# Altium PCB flipperzero-devboard-stlinkv3.PcbDoc
Units mm, origin at the board's own origin, x right, y up, seen from the top; angles counter-clockwise.
Board outline 78.8 x 32.41 mm, 2 copper layers (Top Layer, Bottom Layer); 40 components, 46 nets, 232 pads, 54 vias.
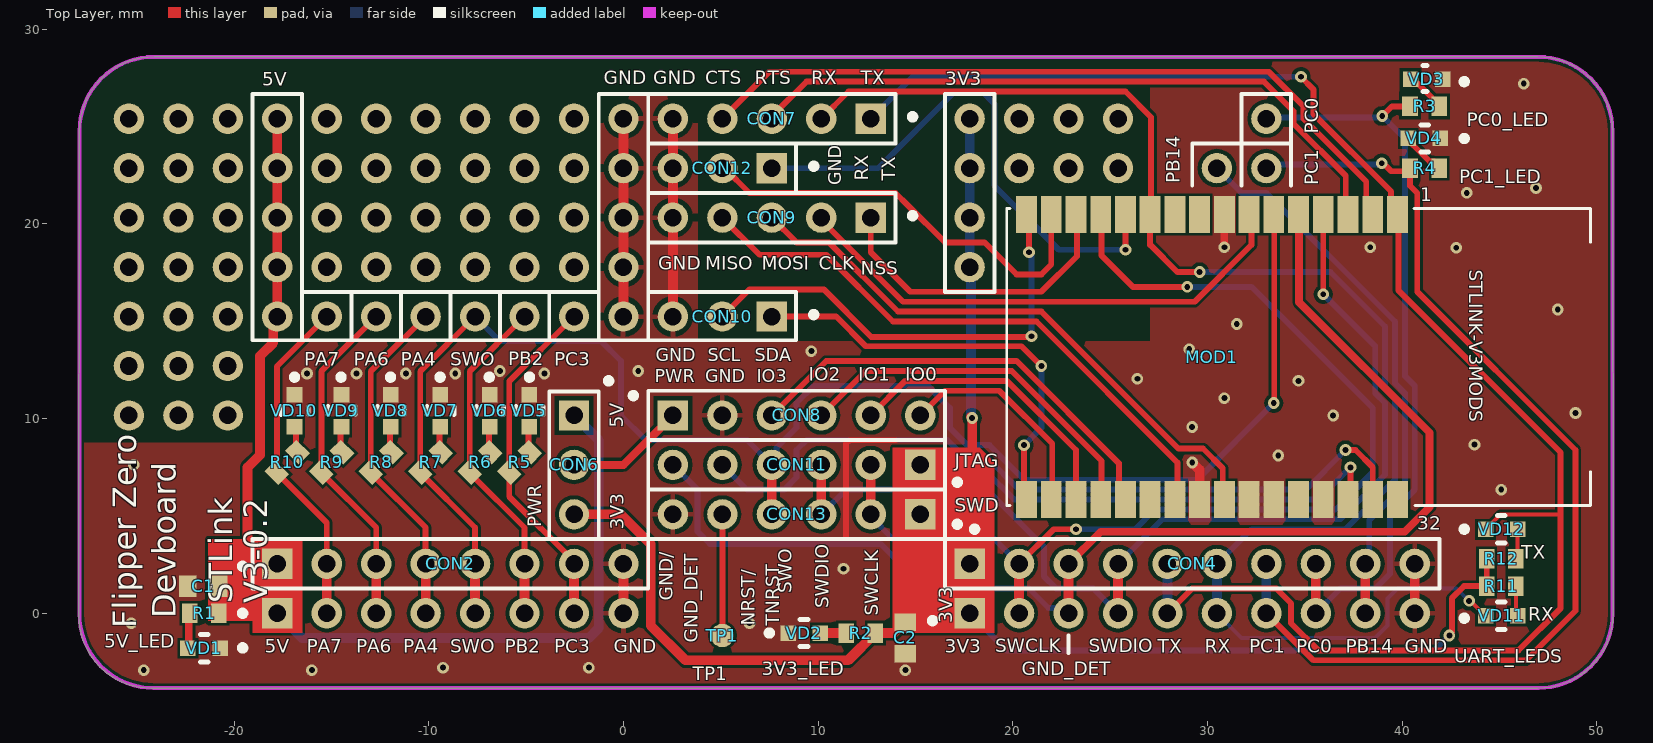
[diagram p0: Top Layer view]
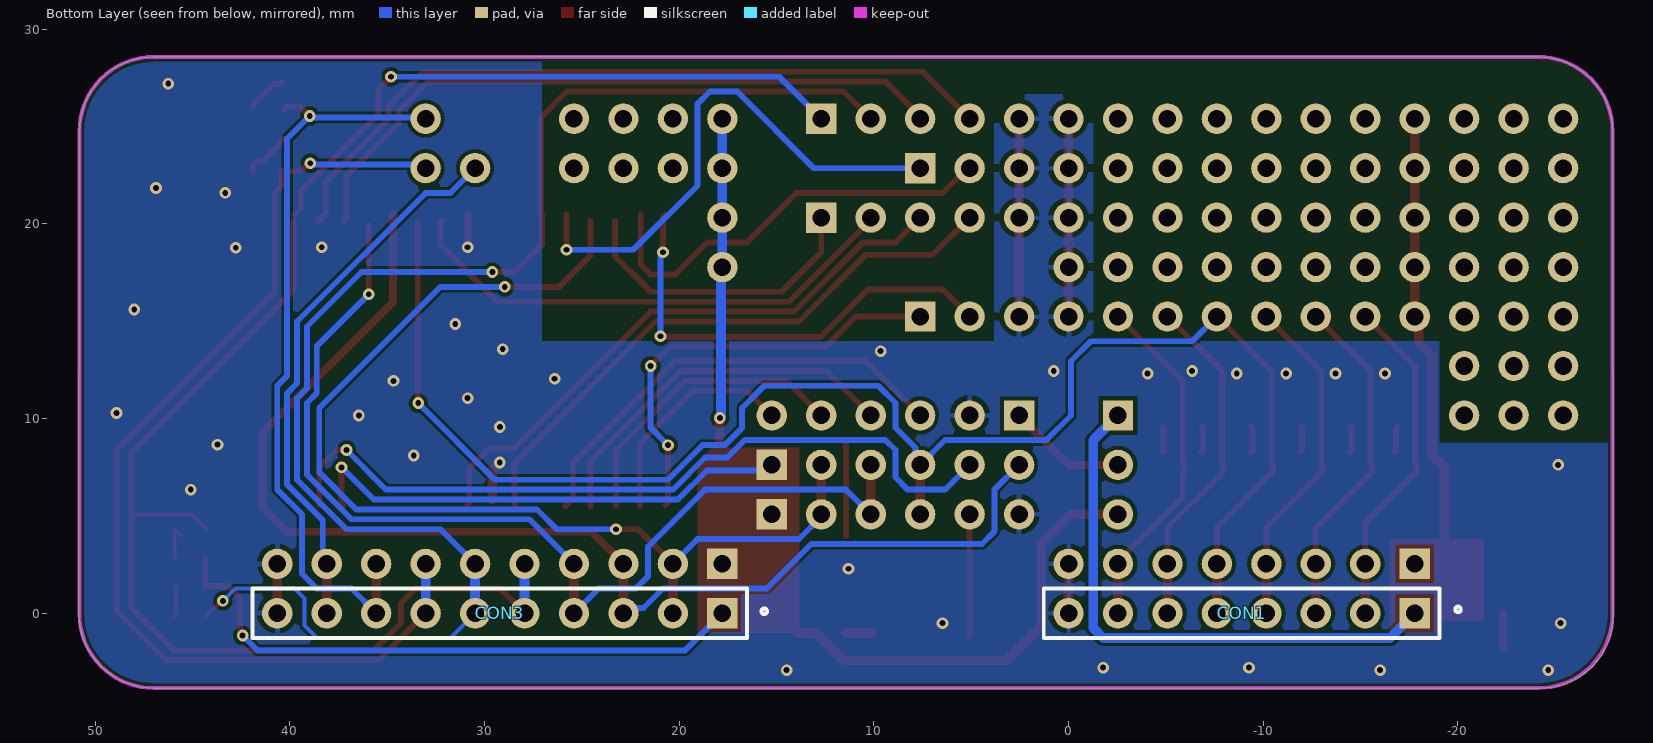
[diagram p1: Bottom Layer view, seen from below]
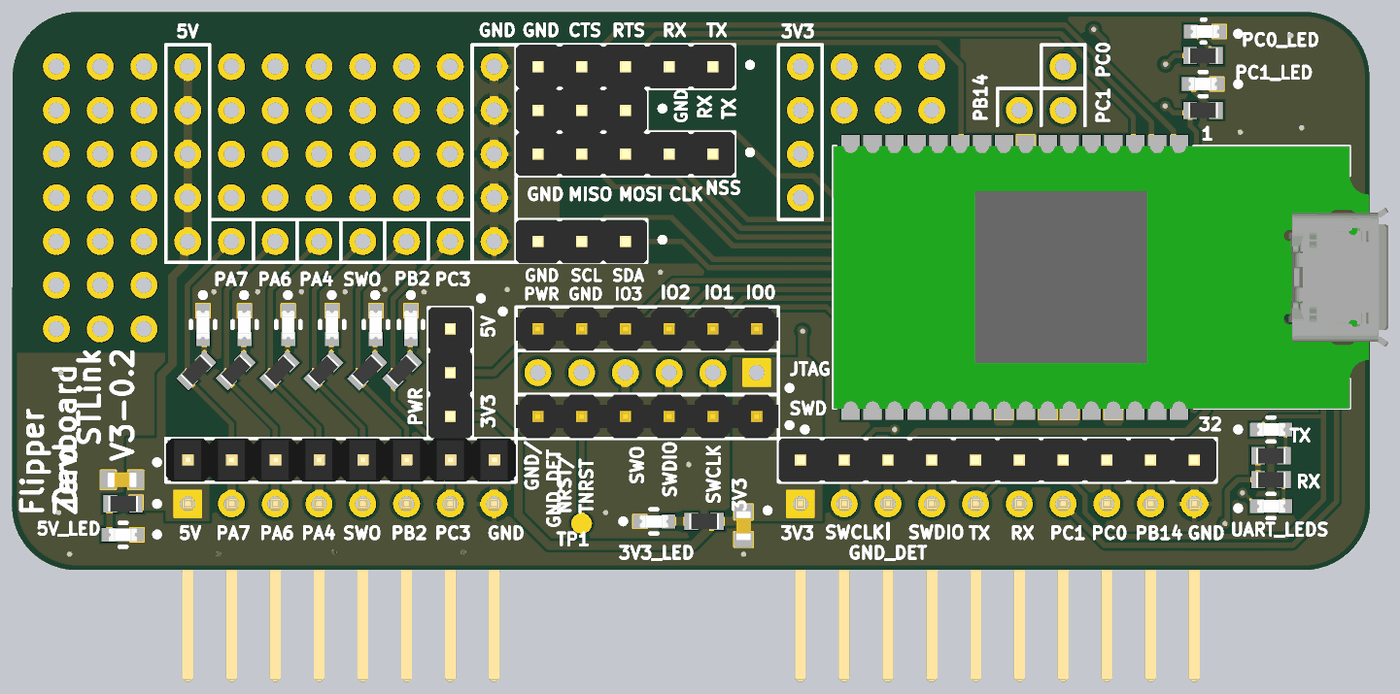
[diagram p2: 3D render of the assembled board from above, using the file's embedded part models]

## Layer stack, top to bottom
Top Solder: solder mask 0.0102, Solder Resist, Dk 3.5
Top Layer: signal copper 0.0356
Dielectric 1: dielectric 0.32, FR-4, Dk 4.8
Bottom Layer: signal copper 0.0356
Bottom Solder: solder mask 0.0102, Solder Resist, Dk 3.5

## Board outline
-24.257,-3.84 cw(c-24.257,-0.128) -27.969,-0.128 -27.94,24.765 cw(c-24.13,24.765) -24.13,28.575 46.99,28.575 cw(c46.99,24.765) 50.8,24.765 50.827,-0.003 cw(c46.99,-0.003) 46.99,-3.84

## Design rules (kind name [scope] priority, off if disabled: settings)
BoardOutlineClearance [All] p1: gap=0.2 ignorepadtopadclearanceinfootprint=FALSE
Clearance [All] p1: gap=0.2 ignorepadtopadclearanceinfootprint=FALSE except(0.1: Arc-Arc Arc-Track Track-Track; 0.15: Arc-SMDPad Arc-Fill Arc-Poly Arc-Region Track-SMDPad Track-Fill Track-Poly Track-Region SMDPad-SMDPad SMDPad-Fill SMDPad-Poly SMDPad-Region Fill-Fill Fill-Poly Fill-Region Poly-Poly Poly-Region Region-Region; 0.3: THPad-Via Via-Via)
ComponentClearance [All] p1: gap=0 collisioncheckmode=3 verticalgap=0 showdistances=FALSE
HoleSize [All] p1: absolutevalues=TRUE maxlimit=5 minlimit=0.1 maxpercent=80.000 minpercent=20.000
HoleToHoleClearance [All] p1: gap=0.35 allowstackedmicrovias=TRUE
MinimumAnnularRing [All] p1: minimumring=0.1
MinimumSolderMaskSliver MinimumSolderMaskSliver_STLINK [InComponent('MOD1')] p1: minsoldermaskwidth=0.09
MinimumSolderMaskSliver [All] p2: minsoldermaskwidth=0.1
PolygonConnect [All] p1: thpad.connectstyle=Relief thpad.reliefconductorwidth=0.254 thpad.reliefentries=4 thpad.polygonreliefangle="90 Angle" thpad.airgapwidth=0.254 smdpad.connectstyle=Direct smdpad.reliefconductorwidth=0.254 smdpad.reliefentries=4 smdpad.polygonreliefangle="90 Angle" smdpad.airgapwidth=0.254 via.connectstyle=Direct via.reliefconductorwidth=0.254 via.reliefentries=4 via.polygonreliefangle="90 Angle" via.airgapwidth=0.254
RoutingVias [All] p1: holewidth=0.2 width=0.4 viastyle="Through Hole" minholewidth=0.1 minwidth=0.3 maxholewidth=2 maxwidth=4
SilkToSilkClearance [All] p1: silktosilkclearance=0.2
SilkToSolderMaskClearance [IsPad OR IsVia] p1: minsilkscreentomaskgap=0.2 clearancetoexposedcopper=TRUE
SolderMaskExpansion [All] p1: expansion=0.05 istentingtop=FALSE
Width [All] p1: maxlimit=1 minlimit=0.1 preferedwidth=0.2
24 further rules are at their usual default settings.

## Components (designator, comment, footprint, x,y, rotation, side; value= is the part's Value field where it differs from the comment)
C1 "1uF" CAP0603 -21.59,1.397 r0 top value=1µF
C2 "1uF" CAP0603 14.478,-1.27 r90 top value=1µF
CON1 "DS1022-1*8R" PLS-8R -17.78,0 r0 bottom locked
CON2 "DS-1021-1x8" PLS-8 -17.78,2.54 r0 top
CON3 "DS1022-1*10R" PLS-10R 17.78,0 r0 bottom
CON4 "DS-1021-1x10" PLS-10 17.78,2.54 r0 top locked
CON6 "DS-1021-1x3" PLS-3 -2.54,10.16 r270 top
CON7 "DS-1021-1x5" PLS-5 12.7,25.4 r180 top
CON8 "DS-1021-1x6" PLS-6 2.54,10.16 r0 top
CON9 "DS-1021-1x5" PLS-5 12.7,20.32 r180 top
CON10 "DS-1021-1x3" PLS-3 7.62,15.24 r180 top
CON11 "DS-1021-1x6" PLS-6 15.24,7.62 r180 top
CON12 "DS-1021-1x3" PLS-3 7.62,22.86 r180 top
CON13 "DS-1021-1x6" PLS-6 15.24,5.08 r180 top locked
MOD1 "STLINK-V3MOD" STLINK-V3MOD 49.657,13.162 r270 top
R1 "1K" RESC1608X55X25ML10T15 -21.526,0 r180 top value=1k
R2 "1K" RESC1608X55X25ML10T15 12.192,-1.016 r180 top value=1k
R3 "1K" RESC1608X55X25ML10T15 41.148,26.035 r0 top value=1k
R4 "1K" RESC1608X55X25ML10T15 41.148,22.86 r0 top value=1k
R5 "1K" RESC1608X55X25ML10T15 -5.334,7.747 r45 top value=1k
R6 "1K" RESC1608X55X25ML10T15 -7.366,7.747 r45 top value=1k
R7 "1K" RESC1608X55X25ML10T15 -9.906,7.747 r45 top value=1k
R8 "1K" RESC1608X55X25ML10T15 -12.446,7.747 r45 top value=1k
R9 "1K" RESC1608X55X25ML10T15 -14.986,7.747 r45 top value=1k
R10 "1K" RESC1608X55X25ML10T15 -17.272,7.747 r45 top value=1k
R11 "1K" RESC1608X55X25ML10T15 45.085,1.397 r180 top value=1k
R12 "1K" RESC1608X55X25ML10T15 45.085,2.794 r180 top value=1k
TP1 "Control_point" "control point_1mm" 5.08,-1.143 r90 top
VD1 "BLUE LED" "LED 0603" -21.526,-1.8 r270 top
VD2 "BLUE LED" "LED 0603" 9.271,-1.016 r90 top
VD3 "GREEN LED" "LED 0603" 41.275,27.432 r270 top
VD4 "GREEN LED" "LED 0603" 41.148,24.384 r270 top
VD5 "GREEN LED" "LED 0603" -4.826,10.414 r0 top
VD6 "GREEN LED" "LED 0603" -6.858,10.414 r0 top
VD7 "GREEN LED" "LED 0603" -9.398,10.414 r0 top
VD8 "GREEN LED" "LED 0603" -11.938,10.414 r0 top
VD9 "GREEN LED" "LED 0603" -14.478,10.414 r0 top
VD10 "GREEN LED" "LED 0603" -16.891,10.414 r0 top
VD11 "RED LED" "LED 0603" 45.085,-0.127 r90 top
VD12 "RED LED" "LED 0603" 45.085,4.318 r90 top

## Footprints (in the part's own frame and the unit in brackets; to place one, negate y for a bottom-side part, rotate by r counter-clockwise, add the part's x,y. Pads: shape width x height; smd on the part's side, far side on the other; paste and mask are expansions set on the pad)
CAP0603 [mm]
  rect 0.9x1.1 smd: 1(-0.8,0) 2(0.8,0)
  body extent -0.85,-0.43 0.85,0.43, height 0.9
"control point_1mm" [mm]
  round 1.2 smd paste-2 mask+0.05: 1(0,0)
"LED 0603" [mm]
  rect 0.8x0.8 smd: 1(-0.005,0.808) 2(-0.005,-0.842)
  silkscreen extent -0.7,-0.2 0.7,0.2, body extent -0.37,-0.84 0.36,0.81, height 0.68
PLS-3 [mm]
  rect 1.56x1.56 hole 0.9: 1(0,0)
  round 1.56 hole 0.9: 2(2.54,0) 3(5.08,0)
  silkscreen extent -1.92,1.64 -1.64,1.92, body extent -1.27,-1.27 6.35,1.27, height 8.54
PLS-5 [mm]
  rect 1.56x1.56 hole 0.9: 1(0,0)
  round 1.56 hole 0.9: 2(2.54,0) 3(5.08,0) 4(7.62,0) 5(10.16,0)
  silkscreen extent -2.29,-0.24 -2.01,0.04, body extent -1.27,-1.27 11.43,1.27, height 8.54
PLS-6 [mm]
  rect 1.56x1.56 hole 0.9: 1(0,0)
  round 1.56 hole 0.9: 2(2.54,0) 3(5.08,0) 4(7.62,0) 5(10.16,0) 6(12.7,0)
  body extent -1.27,-1.27 13.97,1.27, height 8.54
PLS-8 [mm]
  rect 1.56x1.56 hole 0.9: 1(0,0)
  round 1.56 hole 0.9: 2(2.54,0) 3(5.08,0) 4(7.62,0) 5(10.16,0) 6(12.7,0) 7(15.24,0) 8(17.78,0)
  silkscreen extent -1.92,-0.27 -1.64,0.01, body extent -1.27,-1.27 19.05,1.27, height 9.2
PLS-8R [mm]
  rect 1.56x1.56 hole 0.9: 1(0,0)
  round 1.56 hole 0.9: 2(2.54,0) 3(5.08,0) 4(7.62,0) 5(10.16,0) 6(12.7,0) 7(15.24,0) 8(17.78,0)
  silkscreen extent -2.37,-0.34 -2.08,-0.06, body extent -1.27,-0.32 19.05,10.34, height 2.54
PLS-10 [mm]
  rect 1.56x1.56 hole 0.9: 1(0,0)
  round 1.56 hole 0.9: 2(2.54,0) 3(5.08,0) 4(7.62,0) 5(10.16,0) 6(12.7,0) 7(15.24,0) 8(17.78,0) 9(20.32,0) 10(22.86,0)
  silkscreen extent 0.11,1.64 0.4,1.92, body extent -1.27,-1.27 24.13,1.27, height 8.54
PLS-10R [mm]
  rect 1.56x1.56 hole 0.9: 1(0,0)
  round 1.56 hole 0.9: 2(2.54,0) 3(5.08,0) 4(7.62,0) 5(10.16,0) 6(12.7,0) 7(15.24,0) 8(17.78,0) 9(20.32,0) 10(22.86,0)
  silkscreen extent -2.29,-0.24 -2.01,0.04, body extent -1.27,-0.32 24.13,10.34, height 2.54
RESC1608X55X25ML10T15 [mm] "Chip Resistor, 2-Leads, Body 1.70x0.90mm, IPC Low Density"
  rect 0.8x1 smd: 1(-0.75,0) 2(0.75,0)
  body extent -0.85,-0.45 0.85,0.45, height 0.55
STLINK-V3MOD [mil]
  rect 74.8x42.13 smd: 1(-288.19,-390) 2(-288.19,-440) 3(-288.19,-490) 4(-288.19,-540) 5(-288.19,-590) 6(-288.19,-640) 7(-288.19,-690) 8(-288.19,-740) 9(-288.19,-790) 10(-288.19,-840) 11(-288.19,-890) 12(-288.19,-940) 13(-288.19,-990) 14(-288.19,-1040) 15(-288.19,-1090) 16(-288.19,-1140) 17(288.19,-1140) 18(288.19,-1090) 19(288.19,-1040) 20(288.19,-990) 21(288.19,-940) 22(288.19,-890) 23(288.19,-840) 24(288.19,-790) 25(288.19,-740) 26(288.19,-690) 27(288.19,-640) 28(288.19,-590) 29(288.19,-540) 30(288.19,-490) 31(288.19,-440) 32(288.19,-390)
  silkscreen extent -300,-1180 300,0, body extent -300,-1180 300,89, height 126

## Part data
C1 C2: library part CMP-001-00097-2, "Chip Capacitor", Case=0603, Dielectric=X5R, TOLERANCE=10%, Voltage=16V, Case/Package=0603, Company="Flipper Devices", Component Type=Standard, Design Item ID=CAP_1uF_0603, Internal_PN=FDCAP0016, Pins=2, Source=Flipper_zero.SchLib
CON1: library part CMP-003-000005-6, "Connector 2.54mm 1х8 Angular Type", Company="Flipper Zero", Component Type=Standard, Design Item ID=DS-1022-1x8, Internal_PN=FDCON0014, Pin Count=8, Source=MIDI.SchLib
CON2: library part CMP-003-000065-2, "Connector 2.54mm 1х8 Straight Type", Company="Flipper Zero", Component Type=Standard, Design Item ID=DS-1021-1x8, Internal_PN=FDCON0016, Pin Count=8, Source=MIDI.SchLib
CON3: library part CMP-003-000004-6, "Connector 2.54mm 1х10 Angular Type", Company="Flipper Zero", Component Type=Standard, Design Item ID=DS-1022-1x10, Internal_PN=FDCON0015, Pin Count=10, Source=MIDI.SchLib
CON4: library part CMP-003-000066-2, "Connector 2.54mm 1х10 Straight Type", Company="Flipper Zero", Component Type=Standard, Design Item ID=DS-1021-1x10, Internal_PN=FDCON0017, Pin Count=10, Source=MIDI.SchLib
CON6 CON10 CON12: library part CMP-003-000069-1, "Connector 2.54mm 1х3 Straight Type", Company="Flipper Zero", Component Type=Standard, Design Item ID=DS-1021-1x3, Internal_PN=FDCON0018, Pin Count=3, Source=MIDI.SchLib
CON7 CON9: library part CMP-003-000071-1, "Connector 2.54mm 1х5 Straight Type", Company="Flipper Zero", Component Type=Standard, Design Item ID=DS-1021-1x5, Internal_PN=FDCON0020, Pin Count=4, Source=MIDI.SchLib
CON8 CON11 CON13: library part CMP-003-000072-1, "Connector 2.54mm 1х6 Straight Type", Company="Flipper Zero", Component Type=Standard, Design Item ID=DS-1021-1x6, Internal_PN=FDCON0021, Pin Count=6, Source=MIDI.SchLib
MOD1: library part CMP-00030-00002-3, "STLINK-V3 Compact In-Circuit Debugger and Programmer for STM32 Microcontroller", Company="Flipper Devices", Internal_PN=FDMOD0002, Pins=32
R1 R2 R3 R4 R5 R6 R7 R8 R9 R10 R11 R12: library part CMP-009-00014-6, "Chip Resistor, 1 KOhm, +/-5%, 0.1 W, -55 to 155 degC, 0603 (1608 Metric)", Case/Package=0603, Power=100mW, TOLERANCE=5%, Voltage Rating=50V, Company="Flipper Devices", Internal_PN=FDRES0034, Mounting Technology=SM, Pins=2, RoHS Compliant=True
TP1: library part CMP-016-000010-5, "Testpoint", ClassName=Testpoint, Company="Flipper Devices", Component Type="Standard (No BOM)", Design Item ID="control point", Pin Count=1, Source=Flipper_zero.SchLib
VD1 VD2 VD3 VD4 VD5 VD6 VD7 VD8 VD9 VD10 VD11 VD12: library part CMP-003-000068-1, "LED", Case=SMD/SMT, Case/Package=0603, Company="Flipper Devices", Component Type=Standard, Pin Count=2, Source=Flipper_zero.SchLib
  VD1 VD2: Internal_PN=FDDIO0008
  VD3 VD4 VD5 VD6 VD7 VD8 VD9 VD10: Internal_PN=FDDIO0009
  VD11 VD12: Internal_PN=FDDIO0010

## Free pads (board coordinates)
  round 1.56 hole 0.9: 2(-17.78,15.24) 2(-12.7,15.24) 2(-10.16,15.24) 2(-7.62,15.24) 2(-5.08,15.24) 2(-2.54,15.24) 2(0,15.24) ""(-25.4,10.16) ""(-25.4,12.7) ""(-25.4,15.24) ""(-25.4,17.78) ""(-25.4,20.32) ""(-25.4,22.86) ""(-25.4,25.4) ""(-22.86,10.16) ""(-22.86,12.7) ""(-22.86,15.24) ""(-22.86,17.78) ""(-22.86,20.32) ""(-22.86,22.86) ""(-22.86,25.4) ""(-20.32,10.16) ""(-20.32,12.7) ""(-20.32,15.24) ""(-20.32,17.78) ""(-20.32,20.32) ""(-20.32,22.86) ""(-20.32,25.4) ""(-17.78,17.78) ""(-17.78,20.32) ""(-17.78,22.86) ""(-17.78,25.4) ""(-15.24,15.24) ""(-15.24,17.78) ""(-15.24,20.32) ""(-15.24,22.86) ""(-15.24,25.4) ""(-12.7,17.78) ""(-12.7,20.32) ""(-12.7,22.86) ""(-12.7,25.4) ""(-10.16,17.78) ""(-10.16,20.32) ""(-10.16,22.86) ""(-10.16,25.4) ""(-7.62,17.78) ""(-7.62,20.32) ""(-7.62,22.86) ""(-7.62,25.4) ""(-5.08,17.78) ""(-5.08,20.32) ""(-5.08,22.86) ""(-5.08,25.4) ""(-2.54,17.78) ""(-2.54,20.32) ""(-2.54,22.86) ""(-2.54,25.4) ""(0,17.78) ""(0,20.32) ""(0,22.86) ""(0,25.4) ""(17.78,17.78) ""(17.78,20.32) ""(17.78,22.86) ""(17.78,25.4) ""(20.32,22.86) ""(20.32,25.4) ""(22.86,22.86) ""(22.86,25.4) ""(25.4,22.86) ""(25.4,25.4) ""(30.48,22.86) ""(33.02,22.86) ""(33.02,25.4)

## Via types
v1: diameter 0.6, hole 0.3, Top Layer to Bottom Layer, tented both sides, 53 vias
v2: diameter 0.6, hole 0.3, Top Layer to Bottom Layer, 1 vias

## Nets (pads, with @x,y where several pads share a name; then routed paths per layer and width w, separated by ;. In a path a pad name is that pad's centre, name@x,y a point inside that pad or via, vN(x,y) a via of type N, cw(c..) or ccw(c..) an arc to the next point about the centre after c; other vN are vias at no path point)
3V3: C2.2 CON3.1 CON4.1 CON6.3 CON11.1 CON13.1 MOD1.30 pad.@17.78,17.78 pad.@17.78,20.32 pad.@17.78,22.86 pad.@17.78,25.4 R2.1 R11.2 R12.2 | length 108.9
  Top Layer w0.3: MOD1.30@37.259,5.507 37.338,5.586 v1(37.338,7.493) ; v2@42.545,-0.989 42.545,0.764 43.178,1.397 R11.2 R12.2
  Top Layer w0.5: CON6.3 -0.127,5.08 1.397,3.556 1.397,-0.635 3.175,-2.413 11.545,-2.413 R2.1 ; R2.1@12.954,-1.004 R2.1 ; C2.2@14.378,-0.089 C2.2@14.478,-0.089 ; C2.2 14.378,-0.47 14.178,-0.67 14.178,-0.723 13.885,-1.016 R2.1 ; 14.478,0 CON3.1 CON4.1 17.907,2.667 v1(17.907,10.033) v1@17.843,10.096 ; 14.72,2.794 14.72,2.894 ; v2(42.418,-1.143) v2@42.418,-1.116
  Bottom Layer w0.3: CON11.1 15.525,7.335 18.573,7.335 20.066,5.842 35.687,5.842 v1(37.338,7.493) ; CON3.1 19.685,-1.905 41.656,-1.905 v2(42.418,-1.143)
  Bottom Layer w0.5: pad.@17.78,17.78 17.78,20.32 17.78,22.86 pad.@17.78,25.4 ; v1@17.843,10.096 pad.@17.843,17.78
5V: C1.2 CON1.1 CON2.1 CON6.1 pad.2@-17.78,15.24 pad.@-17.78,17.78 pad.@-17.78,20.32 pad.@-17.78,22.86 pad.@-17.78,25.4 R1.1 | length 55
  Top Layer w0.5: -19.05,2.413 -19.304,2.667 -19.304,7.493 -18.669,8.128 -18.669,13.208 -17.983,13.894 -17.983,15.037 -17.78,15.24 -17.78,17.78 -17.78,20.32 -17.78,22.86 pad.@-17.78,25.4 ; CON1.1 CON2.1
  Bottom Layer w0.5: CON1.1 -16.51,-1.27 -1.778,-1.27 -1.27,-0.762 -1.27,8.89 CON6.1
GND: C1.1 C2.1 CON1.8 CON2.8 CON3.10 CON4.10 CON7.5 CON8.2 CON9.5 CON10.3 CON12.3 CON13.6 MOD1.8 MOD1.24 MOD1.26 MOD1.27 MOD1.29 pad.2@0,15.24 pad.@0,17.78 pad.@0,20.32 pad.@0,22.86 pad.@0,25.4 VD1.1 VD2.1 VD3.1 VD4.1 VD5.1 VD6.1 VD7.1 VD8.1 VD9.1 VD10.1 | length 36.5
  Top Layer w0.3: 11.43,3.977 11.43,8.714 11.606,8.89 13.97,8.89
  Top Layer w0.381: v1(30.861,18.796) MOD1.8
  Top Layer w0.5: CON1.8 CON2.8 ; pad.2@0,15.24 0,17.78 0,20.32 0,22.86 pad.@0,25.4 ; CON10.3 CON9.5 CON12.3 CON7.5 ; v1(29.21,7.747) 29.591,7.366 MOD1.24 ; CON3.10 CON4.10
  other v1: -24.638,-2.921 -16.002,-2.921 14.478,-2.921 -9.271,-2.794 -1.778,-2.794 -25.273,-0.508 6.477,-0.508 11.303,2.286 45.085,6.35 -25.146,7.62 33.631,8.104 43.705,8.66 29.205,9.571 36.449,10.16 48.895,10.287 30.861,11.049 34.671,11.938 26.392,12.041 -16.256,12.319 -13.716,12.319 -11.176,12.319 -8.636,12.319 -4.064,12.319 -6.35,12.446 0.762,12.446 9.652,13.462 29.059,13.565 31.496,14.859 47.982,15.597 42.775,18.772 38.354,18.796 43.307,21.59 46.863,21.844 46.241,27.2
GND_DETECT: CON3.3 CON4.3 CON11.6 MOD1.5 | length 64.8
  Top Layer w0.4: CON4.3 24.511,4.191 40.132,4.191 41.402,5.461 41.402,9.271 34.696,15.977 34.696,20.457 MOD1.5
  Top Layer w0.5: CON3.3 CON4.3
  Bottom Layer w0.3: CON11.6 3.81,6.35 3.81,4.191 4.445,3.556 13.208,3.556 15.494,1.27 20.828,1.27 21.824,0.274 22.586,0.274 CON3.3
GPIO0: CON8.6 MOD1.18 | length 11.6
  Top Layer w0.3: CON8.6 16.51,11.43 19.304,11.43 22.019,8.715 MOD1.18@22.019,5.507
GPIO1: CON8.5 MOD1.19 | length 15.6
  Top Layer w0.3: CON8.5 14.478,11.938 19.685,11.938 23.241,8.382 MOD1.19 MOD1.19@23.241,5.555
GPIO2: CON8.4 MOD1.20 | length 19.6
  Top Layer w0.3: CON8.4 12.446,12.446 19.939,12.446 24.559,7.826 MOD1.20@24.559,5.507
GPIO3: CON8.3 MOD1.21 | length 23.5
  Top Layer w0.3: CON8.3 10.414,12.954 20.193,12.954 25.444,7.703 25.444,5.892 MOD1.21@25.829,5.507
I2C_SCL: CON10.2 MOD1.16 | length 23.8
  Top Layer w0.3: CON10.2 6.477,16.637 8.89,16.637 10.287,16.637 12.729,14.195 20.926,14.195 v1(20.955,14.224) ; MOD1.16 20.828,20.355 v1(20.828,18.542)
  Bottom Layer w0.3: v1(20.828,18.542) 20.828,18.461 20.955,18.334 v1(20.955,14.224)
I2C_SDA: CON10.1 MOD1.17 | length 22.5
  Top Layer w0.3: CON10.1 10.922,15.24 12.446,13.716 20.447,13.716 v1(21.463,12.7) ; v1(20.574,8.636) 20.574,5.682 MOD1.17@20.701,5.555
  Bottom Layer w0.3: v1(20.574,8.636) 21.463,9.525 v1(21.463,12.7)
NetCON6_2: CON6.2 CON8.1 | length 6.1
  Top Layer w0.4: CON6.2 0,7.62 CON8.1
NetR1_2: R1.2 VD1.2 | length 1.8
  Top Layer w0.381: VD1.2@-22.322,-1.795 R1.2@-22.322,0
NetR2_2: R2.2 VD2.2 | length 1.3
  Top Layer w0.5: VD2.2@10.116,-1.019 R2.2@11.439,-1.019
NetR3_2: R3.2 VD3.2 | length 2.1
  Top Layer w0.3: VD3.2@40.387,27.31 40.51,27.187 40.819,27.187 41.621,26.385 41.648,26.385 41.898,26.135 R3.2
NetR4_2: R4.2 VD4.2 | length 2.5
  Top Layer w0.3: VD4.2 40.556,24.139 40.556,24.048 41.394,23.21 41.648,23.21 41.898,22.96 R4.2@41.898,22.706
NetR5_2: R5.2 VD5.2 | length 1.3
  Top Layer w0.3: VD5.2 -4.874,9.529 -4.874,8.348 R5.2
NetR6_2: R6.2 VD6.2 | length 1.3
  Top Layer w0.3: VD6.2 -6.906,9.529 -6.906,8.348 R6.2
NetR7_2: R7.2 VD7.2 | length 1.3
  Top Layer w0.3: VD7.2 -9.446,9.529 -9.446,8.348 R7.2
NetR8_2: R8.2 VD8.2 | length 1.3
  Top Layer w0.3: VD8.2 -11.986,9.529 -11.986,8.348 R8.2
NetR9_2: R9.2 VD9.2 | length 1.3
  Top Layer w0.3: VD9.2 -14.526,9.529 -14.526,8.348 R9.2
NetR10_2: R10.2 VD10.2 | length 1.4
  Top Layer w0.3: VD10.2 -16.812,9.488 -16.812,8.348 R10.2
NetR11_1: R11.1 VD11.2 | length 1.6
  Top Layer w0.2: R11.1 45.835,-0.04 VD11.2
NetR12_1: R12.1 VD12.2 | length 2
  Top Layer w0.2: VD12.2@45.627,4.013 VD12.2 45.927,2.886 R12.1
NRST: CON13.5 TP1.1 | length 6.3
  Top Layer w0.3: TP1.1@5.08,-1.188 CON13.5
PA4: CON1.4 CON2.4 pad.2@-10.16,15.24 R8.1 | length 17.6
  Top Layer w0.3: CON2.4 -10.16,4.4 R8.1 -13.047,7.287 -13.047,7.641 -12.976,7.712 -12.976,12.424 pad.2@-10.16,15.24
  Top Layer w0.5: CON1.4 CON2.4
PA6: CON1.3 CON2.3 pad.2@-12.7,15.24 R9.1 | length 17.6
  Top Layer w0.3: CON2.3 -12.7,4.4 R9.1 -15.587,7.287 -15.587,7.641 -15.516,7.712 -15.516,12.424 pad.2@-12.7,15.24
  Top Layer w0.5: CON1.3 CON2.3
PA7: CON1.2 CON2.2 pad.@-15.24,15.24 R10.1 | length 17.4
  Top Layer w0.3: CON2.2 -15.24,4.654 R10.1 -17.873,7.287 -17.873,7.641 -17.802,7.712 -17.802,12.678 pad.@-15.24,15.24
  Top Layer w0.5: CON1.2 CON2.2
PB2: CON1.6 CON2.6 pad.2@-5.08,15.24 R6.1 | length 17.6
  Top Layer w0.3: CON2.6 -5.08,4.4 -7.826,7.146 -7.967,7.287 -7.967,7.641 -7.896,7.712 -7.896,12.424 pad.2@-5.08,15.24
  Top Layer w0.5: CON1.6 CON2.6
PB14: CON3.9 CON4.9 pad.@30.48,22.86 | length 28.4
  Top Layer w0.5: CON3.9 CON4.9
  Bottom Layer w0.3: pad.@30.48,22.86 31.75,21.59 33.02,21.59 39.624,14.986 39.624,11.811 40.132,11.303 40.132,6.604 38.307,4.779 38.307,2.747 CON4.9
PC0: CON3.8 CON4.8 pad.@33.02,25.4 R3.1 | length 39.6
  Top Layer w0.3: v1(38.972,25.539) 39.468,26.035 40.148,26.035 40.271,25.912 R3.1@40.271,25.808
  Top Layer w0.5: CON3.8 CON4.8
  Bottom Layer w0.3: pad.@33.089,25.469 v1@38.902,25.469 ; CON3.8 36.83,1.27 38.608,1.27 39.37,2.032 39.37,5.08 40.64,6.35 40.64,11.684 40.132,12.192 40.132,18.161 40.132,24.379 v1(38.972,25.539) ; CON4.8 CON4.8@35.814,2.54
PC1: CON3.7 CON4.7 pad.@33.02,22.86 R4.1 | length 54.4
  Top Layer w0.3: CON3.7 35.433,-2.413 46.355,-2.413 48.895,0.127 48.895,8.382 40.767,16.51 40.767,21.59 40.398,21.959 40.398,22.706 39.432,22.706 39.024,23.114 v1(38.943,23.114) ; CON4.7 CON4.7@33.02,2.667
  Bottom Layer w0.3: CON4.7 CON4.7@33.02,2.667 ; pad.@33.099,22.86 33.295,23.057 38.886,23.057 v1(38.943,23.114)
  Bottom Layer w0.5: CON3.7 CON4.7
PC3: CON1.7 CON2.7 pad.2@-2.54,15.24 R5.1 | length 18.1
  Top Layer w0.3: CON2.7 -2.54,2.667 -5.864,5.991 R5.1 -5.935,7.287 -5.935,7.641 -5.864,7.712 -5.864,11.916 pad.2@-2.54,15.24
  Top Layer w0.5: CON1.7 CON2.7
SPI_CLK: CON9.2 MOD1.7 | length 26.4
  Top Layer w0.3: CON9.2 10.16,20.193 14.351,16.002 29.337,16.002 32.258,18.923 32.258,20.068 MOD1.7@32.179,20.147
SPI_MISO: CON9.4 MOD1.23 | length 30.8
  Top Layer w0.3: CON9.4 6.985,18.415 10.414,18.415 13.843,14.986 21.209,14.986 28.448,7.747 28.448,5.586 MOD1.23@28.369,5.507
SPI_MOSI: CON9.3 MOD1.25 | length 30.5
  Top Layer w0.3: CON9.3 8.89,19.05 10.541,19.05 14.097,15.494 21.463,15.494 28.5,8.457 29.77,8.457 30.78,7.447 30.78,5.636 MOD1.25@30.909,5.507
SPI_NSS: CON9.1 MOD1.14 | length 15.8
  Top Layer w0.3: CON9.1 12.7,18.542 14.732,16.51 21.463,16.51 23.289,18.336 MOD1.14@23.289,20.147
SWCLK: CON3.2 CON4.2 CON11.2 CON13.2 MOD1.13 | length 56.2
  Top Layer w0.3: CON4.2 22.098,4.318 v1(23.241,4.318) ; MOD1.13@24.559,20.147 24.559,18.367 26.162,16.764 v1(28.956,16.764)
  Top Layer w0.5: CON13.2 CON11.2 ; CON3.2 CON4.2
  Bottom Layer w0.3: CON13.2 12.7,4.953 13.843,3.81 19.05,3.81 CON4.2 ; v1(23.241,4.318) 26.289,4.318 27.305,5.334 36.576,5.334 38.481,7.239 38.481,10.541 32.258,16.764 v1(28.956,16.764)
SWDIO: CON3.4 CON4.4 CON11.3 CON13.3 MOD1.4 | length 54.1
  Top Layer w0.3: v1(35.941,16.383) MOD1.4@35.941,19.941
  Top Layer w0.5: CON13.3 CON11.3 ; CON3.4 CON4.4
  Bottom Layer w0.3: CON13.3 11.43,6.35 18.669,6.35 21.59,3.429 21.59,1.905 22.225,1.27 24.13,1.27 CON3.4 ; CON4.4 27.686,4.826 36.83,4.826 39.116,7.112 39.116,10.795 38.608,11.303 38.608,13.716 v1(35.941,16.383)
SWO: CON1.5 CON2.5 CON11.4 CON13.4 MOD1.6 pad.2@-7.62,15.24 R7.1 | length 82.3
  Top Layer w0.3: CON2.5 -7.62,4.4 R7.1 -10.507,7.287 -10.507,7.641 -10.436,7.712 -10.436,12.424 pad.2@-7.62,15.24 ; v1(33.401,10.795) 33.426,10.82 33.426,20.074 MOD1.6@33.401,20.099
  Top Layer w0.5: CON1.5 CON2.5 ; CON13.4 CON11.4
  Bottom Layer w0.3: pad.2@-7.62,15.24 -6.35,13.97 -1.143,13.97 -0.127,12.954 -0.127,10.16 1.139,8.894 ; 1.143,8.89 1.139,8.894 ; v1(33.401,10.795) 29.464,6.858 20.574,6.858 18.796,8.636 17.653,8.636 16.764,9.525 16.764,10.541 15.621,11.684 9.779,11.684 8.89,10.795 8.89,9.525 7.861,8.496 7.861,7.861 CON11.4 6.346,8.894 1.139,8.894
T_NRST: CON11.5 MOD1.31 | length 40
  Top Layer w0.3: v1(37.084,8.382) 37.592,8.382 38.481,7.493 MOD1.31@38.481,5.555
  Bottom Layer w0.3: CON11.5 6.35,6.35 8.255,6.35 8.89,6.985 8.89,8.382 9.412,8.904 16.623,8.904 17.526,8.001 18.669,8.001 20.32,6.35 35.052,6.35 v1(37.084,8.382)
UART_CTS: CON7.4 MOD1.2 | length 39
  Top Layer w0.3: CON7.4 7.493,27.813 32.512,27.813 33.147,27.813 34.925,26.035 34.925,25.4 38.147,22.178 38.147,20.529 MOD1.2@38.529,20.147
UART_RTS: CON7.3 MOD1.3 | length 35.1
  Top Layer w0.3: CON7.3 7.62,25.527 9.398,27.305 32.893,27.305 34.417,25.781 34.417,25.146 37.095,22.468 37.095,20.311 MOD1.3@37.259,20.147
UART_RX: CON3.6 CON4.6 CON7.2 MOD1.11 VD11.1 | length 76.8
  Top Layer w0.2: v1(43.434,0.635) 43.51,0.635 VD11.1
  Top Layer w0.3: CON7.2 11.557,26.797 25.781,26.797 27.099,25.479 MOD1.11@27.099,20.482 ; MOD1.11 27.051,18.923 28.448,17.526 v1(29.591,17.526)
  Bottom Layer w0.2: CON3.6 31.75,-1.27 38.608,-1.27 39.243,-0.635 39.243,0.762 39.751,1.27 42.799,1.27 v1(43.434,0.635)
  Bottom Layer w0.3: v1(29.591,17.526) 29.595,17.53 36.318,17.53 39.116,14.732 39.116,11.557 39.624,11.049 39.624,6.858 37.084,4.318 32.258,4.318 CON4.6
  Bottom Layer w0.5: CON3.6 CON4.6
UART_TX: CON3.5 CON4.5 CON7.1 MOD1.1 VD12.1 | length 85.7
  Top Layer w0.2: VD12.1 45.045,5.08 48.133,5.08 ; 48.128,4.313 48.133,4.318
  Top Layer w0.3: CON3.5 29.21,1.27 33.528,1.27 34.29,0.508 34.29,-0.508 35.687,-1.905 45.974,-1.905 48.133,0.254 48.133,4.318 48.133,5.08 48.133,8.255 39.799,16.589 MOD1.1@39.799,20.147 ; v1(34.798,27.559) 34.798,27.543 35.433,26.908 35.433,25.654 39.417,21.67 39.417,20.816 MOD1.1
  Bottom Layer w0.3: CON7.1 14.859,27.559 v1(34.798,27.559)
  Bottom Layer w0.5: CON3.5 CON4.5
VCP_RX: CON12.2 MOD1.15 | length 21.9
  Top Layer w0.3: CON12.2 5.207,22.86 6.477,21.59 13.97,21.59 14.605,20.955 16.51,19.05 18.542,19.05 20.193,17.399 21.463,17.399 21.974,17.91 21.974,18.795 21.971,18.797 MOD1.15
VCP_TX: CON12.1 MOD1.12 | length 27.4
  Top Layer w0.3: v1(25.781,18.669) MOD1.12
  Bottom Layer w0.3: CON12.1 13.081,22.86 17.018,26.797 18.415,26.797 19.05,26.162 19.05,21.971 22.352,18.669 v1(25.781,18.669)
pads on no net: MOD1.9 MOD1.10 MOD1.22 MOD1.28 MOD1.32

## Polygon pours and split planes (outlines as drawn)
GND on Top Layer "F.Cu-GND" (solid, remove dead copper, pour order 0): -27.686,-3.81 51.308,-3.81 51.308,28.575 27.051,28.575 27.051,13.97 3.81,13.97 3.81,26.657 -1.27,26.657 -1.27,13.97 -19.05,13.97 -19.05,8.763 -27.686,8.763
GND on Bottom Layer "F.Cu-GND" (solid, remove dead copper, pour order 4): -27.686,-3.81 51.308,-3.81 51.308,28.575 27.051,28.575 27.051,13.97 3.81,13.97 3.81,26.657 -1.27,26.657 -1.27,13.97 -19.05,13.97 -19.05,8.763 -27.686,8.763

## Keep-outs
Keep-Out Layer:
  lines w0.2: -24.13,28.575 ccw(c-24.13,24.765) -27.94,24.765 -27.94,-0.03 ccw(c-24.13,-0.03) -24.13,-3.84 46.99,-3.84 ccw(c46.99,-0.03) 50.8,-0.03 50.8,24.765 ; -24.13,28.575 46.99,28.575 ; -24.13,28.575 46.99,28.575 ; 46.99,28.575 cw(c46.99,24.765) 50.8,24.765 ; 46.99,28.575 cw(c46.99,24.765) 50.8,24.765

## Other copper
Top Layer:
  region net 3V3: 13.843,8.509 18.288,8.509 19.05,7.747 19.05,-1 13.843,-1
  region net 5V: -21.336,3.81 -16.51,3.81 -16.51,-1 -19.05,-1 -19.05,-0.381 -21.336,-0.381

## Silkscreen, mask and mechanical layers (free items; w line width, h text height)
Top Overlay:
  circle w0.3: c43.18,24.384 r0.141
  circle w0.3: c43.18,27.305 r0.141
  circle w0.3: c43.18,4.318 r0.141
  circle w0.3: c43.18,-0.254 r0.141
  circle w0.3: c7.493,-1.016 r0.141
  circle w0.3: c15.875,-0.381 r0.141
  circle w0.3: c-19.558,-1.778 r0.141
  circle w0.3: c-19.558,0 r0.141
  circle w0.3: c-4.829,12.128 r0.141
  circle w0.3: c-6.896,12.128 r0.141
  circle w0.3: c-9.417,12.128 r0.141
  circle w0.3: c-11.966,12.128 r0.141
  circle w0.3: c-14.507,12.128 r0.141
  circle w0.3: c-16.895,12.128 r0.141
  circle w0.3: c0.508,11.176 r0.141
  lines w0.2: -16.51,16.51 -1.27,16.51 ; -13.97,14.097 -13.97,16.51 ; -11.43,14.097 -11.43,16.51 ; -8.89,14.021 -8.89,16.51 ; -6.35,14.097 -6.35,16.51 ; -3.81,3.81 -3.81,11.397 -1.27,11.397 -1.27,3.81 ; -3.81,14.097 -3.81,16.51 ; 1.27,16.51 8.857,16.51 8.857,14.021 1.27,14.021 ; 8.857,21.59 8.857,24.13 ; 22.86,-2.032 22.86,-1.143 ; 29.21,21.971 29.21,24.13 31.75,24.13 ; 31.75,21.971 31.75,24.13 ; 34.29,21.971 34.29,24.13 ; -19.05,1.27 -19.05,3.81 1.27,3.81 ; -19.05,1.27 1.27,1.27 ; -19.05,1.27 1.27,1.27 ; -16.51,14.021 -1.27,14.021 ; -16.51,14.021 -16.51,26.67 -19.05,26.67 -19.05,14.021 -16.51,14.021 ; -1.27,14.021 1.27,14.021 ; -1.27,14.021 -1.27,26.67 1.27,26.67 ; 1.27,1.27 1.27,3.81 ; 1.27,3.81 1.27,6.35 ; 1.27,3.81 16.51,3.81 ; 1.27,6.35 1.27,8.89 ; 1.27,6.35 16.51,6.35 ; 1.27,6.35 16.51,6.35 ; 1.27,8.89 16.51,8.89 ; 1.27,8.89 1.27,11.43 16.51,11.43 16.51,8.89 ; 1.27,8.89 16.51,8.89 ; 1.27,14.021 1.27,26.67 ; 1.27,26.67 1.27,24.13 13.97,24.13 13.97,26.67 1.27,26.67 ; 16.51,1.27 41.91,1.27 ; 16.51,1.27 41.91,1.27 ; 16.51,1.27 16.51,3.81 ; 16.51,3.81 16.51,6.35 ; 16.51,3.81 41.91,3.81 41.91,1.27 ; 16.51,6.35 16.51,8.89 ; 31.75,24.13 31.75,26.67 34.29,26.67 34.29,24.13 ; 31.75,24.13 34.29,24.13 ; 31.75,24.13 34.29,24.13 ; 1.27,19.05 13.97,19.05 13.97,21.59 1.27,21.59 1.27,19.05 ; 16.51,16.51 19.05,16.51 19.05,26.67 16.51,26.67 16.51,16.51
  text "GND" at -1.016,27.178 h0.7
  text "GND" at 1.524,27.178 h0.7
  text "CTS" at 4.191,27.178 h0.7
  text "RTS" at 6.731,27.178 h0.7
  text "RX" at 9.652,27.178 h0.7
  text "TX" at 12.192,27.178 h0.7
  text "5V" at -18.562,27.105 h0.7
  text "3V3" at 16.536,27.107 h0.7
  text "PC0_LED" at 43.307,25.019 h0.7
  text "PC0" at 35.687,24.638 h0.7 r90
  text "RX" at 12.573,22.225 h0.7 r90
  text "TX" at 13.97,22.225 h0.7 r90
  text "PB14" at 28.575,22.098 h0.7 r90
  text "PC1_LED" at 42.926,22.098 h0.7
  text "GND" at 11.176,21.991 h0.65 r90
  text "PC1" at 35.687,21.971 h0.7 r90
  text "GND" at 1.778,17.653 h0.7
  text "MISO" at 4.191,17.653 h0.7
  text "MOSI" at 7.112,17.653 h0.7
  text "CLK" at 10.033,17.653 h0.7
  text "NSS" at 12.192,17.399 h0.7
  text "GND" at 1.651,12.954 h0.65
  text "SCL" at 4.318,12.954 h0.65
  text "SDA" at 6.731,12.954 h0.65
  text "PB2" at -5.915,12.75 h0.7
  text "PA7" at -16.383,12.7 h0.7
  text "PA6" at -13.843,12.7 h0.7
  text "PA4" at -11.43,12.7 h0.7
  text "SWO" at -8.89,12.7 h0.7
  text "PC3" at -3.556,12.7 h0.7
  text "IO2" at 9.525,11.938 h0.7
  text "IO1" at 12.065,11.938 h0.7
  text "IO0" at 14.478,11.938 h0.7
  text "PWR" at 1.607,11.875 h0.65
  text "GND" at 4.191,11.875 h0.65
  text "IO3" at 6.858,11.875 h0.65
  text "5V" at 0,9.525 h0.7 r90
  text "JTAG" at 17.018,7.493 h0.7
  text "SWD" at 17.018,5.207 h0.7
  text "PWR" at -4.215,4.424 h0.7 r90
  text "3V3" at 0.015,4.289 h0.7 r90
  text "TX" at 46.101,2.794 h0.7
  text "SWO" at 8.636,1.016 h0.7 r90
  text "GND/" at 2.54,0.635 h0.7 r90
  text "STLink  / V3-0.2" at -18.291,0.508 h1.2 r90
  text "SWDIO" at 10.541,0.254 h0.7 r90
  text "SWCLK" at 13.081,-0.127 h0.7 r90
  text "Devboard" at -22.987,-0.254 h1.2 r90
  text "RX" at 46.482,-0.381 h0.7
  text "3V3" at 16.891,-0.508 h0.7 r90
  text "NRST/" at 6.731,-0.635 h0.7 r90
  text "TNRST" at 8.001,-0.635 h0.7 r90
  text "Flipper Zero" at -25.019,-0.762 h1.2 r90
  text "GND_DET" at 3.81,-1.524 h0.7 r90
  text "5V_LED" at -26.67,-1.778 h0.7
  text "SWCLK" at 19.083,-1.99 h0.7
  text "SWDIO" at 23.909,-1.99 h0.7
  text "5V" at -18.415,-2.032 h0.7
  text "PA7" at -16.256,-2.032 h0.7
  text "PA6" at -13.716,-2.032 h0.7
  text "PA4" at -11.303,-2.032 h0.7
  text "SWO" at -8.89,-2.032 h0.7
  text "PB2" at -6.096,-2.032 h0.7
  text "PC3" at -3.556,-2.032 h0.7
  text "GND" at -0.508,-2.032 h0.7
  text "3V3" at 16.51,-2.032 h0.7
  text "TX" at 27.432,-2.032 h0.7
  text "RX" at 29.845,-2.032 h0.7
  text "PC1" at 32.131,-2.032 h0.7
  text "PC0" at 34.544,-2.032 h0.7
  text "PB14" at 37.084,-2.032 h0.7
  text "GND" at 40.132,-2.032 h0.7
  text "UART_LEDS" at 42.672,-2.54 h0.7
  text "3V3_LED" at 7.112,-3.175 h0.7
  text "GND_DET" at 20.447,-3.175 h0.7
  text "TP1" at 3.556,-3.429 h0.7
Bottom Overlay:
  lines w0.2: -19.05,-1.27 1.27,-1.27 1.27,1.27 -19.05,1.27 -19.05,-1.27 ; 16.51,-1.27 41.91,-1.27 41.91,1.27 16.51,1.27 16.51,-1.27
Mechanical 13:
  lines w0.152: -17.78,0 -17.78,2.54

## Text inside footprints (layer, text, board x,y; h text height)
MOD1: Top Overlay "STLINK-V3MODS" at 43.434,17.653 h0.7 r270; Top Overlay "32" at 40.78,4.294 h0.7; Top Overlay "1" at 40.934,21.166 h0.7